# Altium PCB PCB1.PcbDoc
Units mm, origin at the board's own origin, x right, y up, seen from the top; angles counter-clockwise.
Board outline 39 x 14 mm, 2 copper layers (Top Layer, Bottom Layer); 20 components, 24 nets, 112 pads, 25 vias.
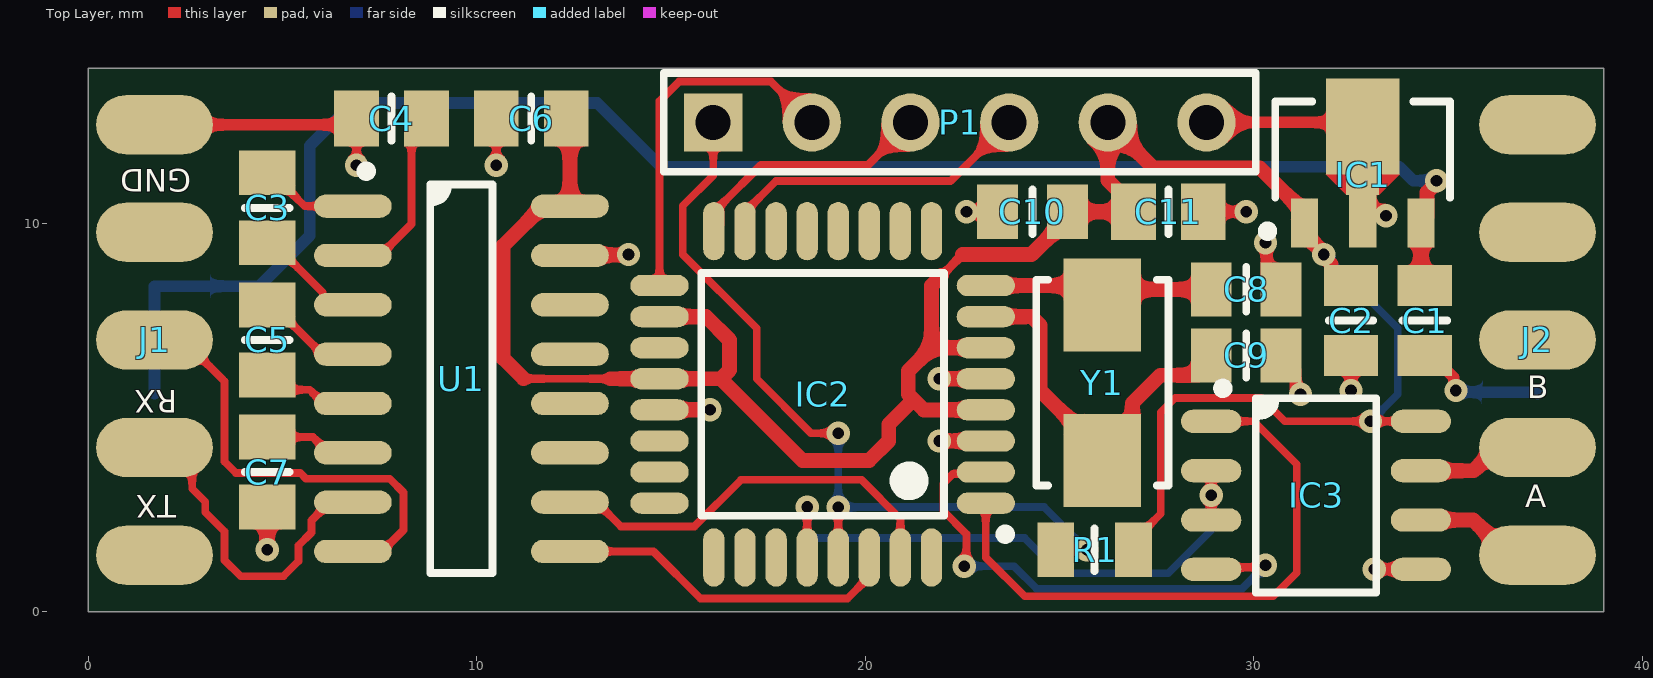
[diagram p0: Top Layer view]
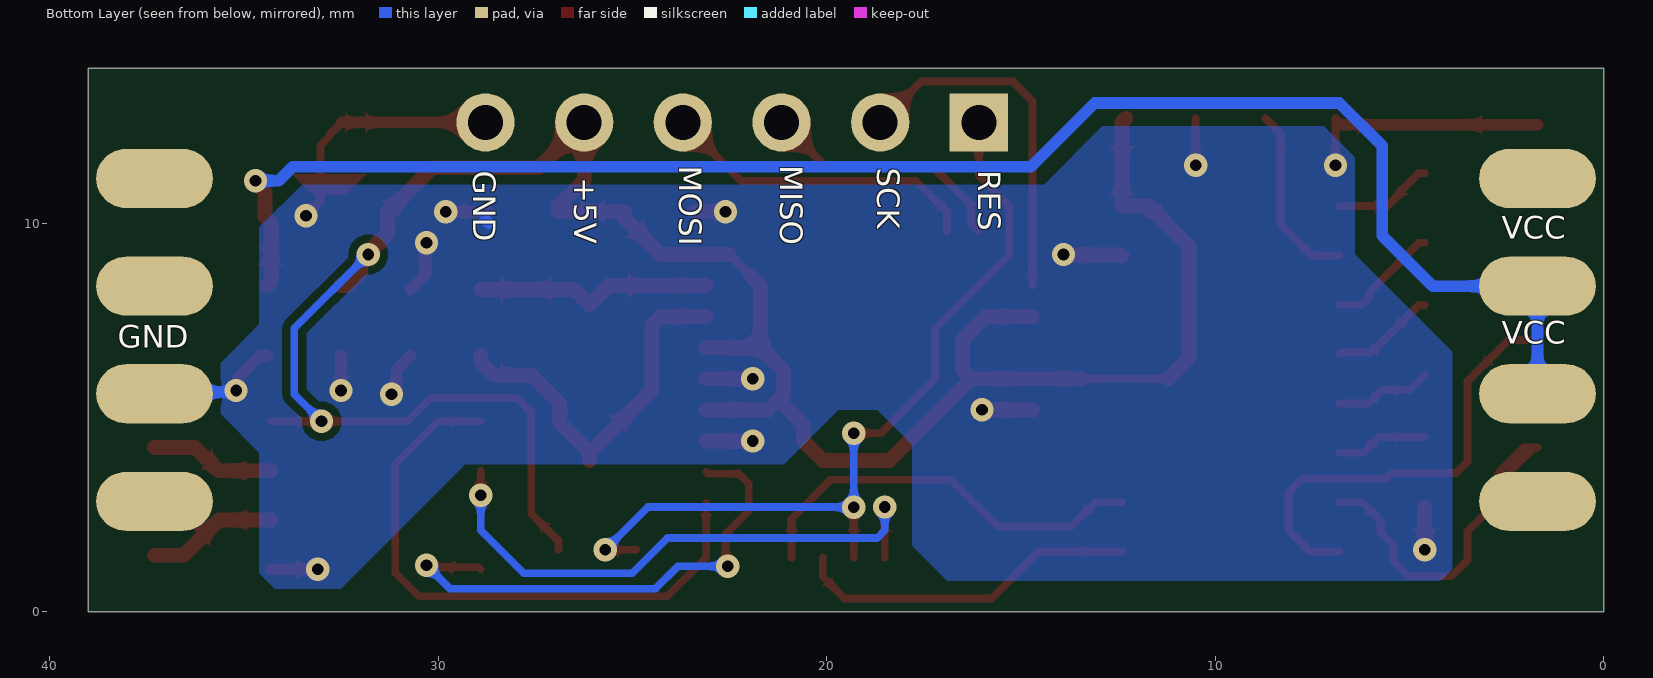
[diagram p1: Bottom Layer view, seen from below]
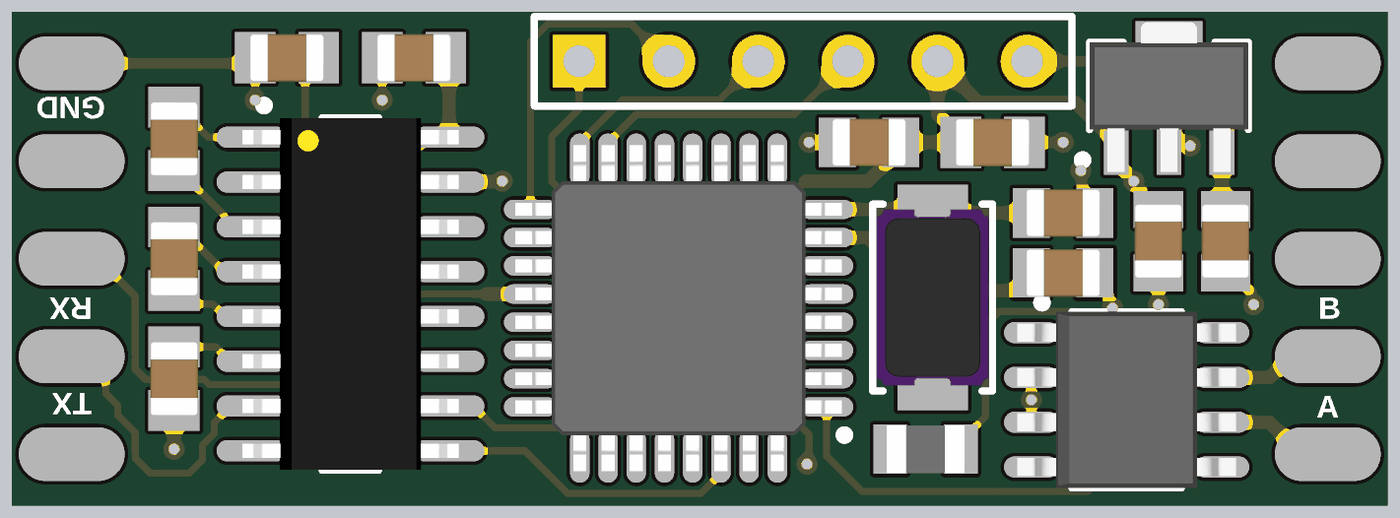
[diagram p2: 3D render of the assembled board from above, using the file's embedded part models]

## Layer stack, top to bottom
Top Solder: solder mask 0.0102, Solder Resist, Dk 3.5
Top Layer: signal copper 0.0356
Dielectric 1: dielectric 0.32, FR-4, Dk 4.8
Bottom Layer: signal copper 0.0356
Bottom Solder: solder mask 0.0102, Solder Resist, Dk 3.5

## Board outline
0,0 0,14 39,14 39,0

## Design rules (kind name [scope] priority, off if disabled: settings)
BoardOutlineClearance [All] p1: gap=0.2 ignorepadtopadclearanceinfootprint=FALSE except(0.4: Arc-SplitBarrior Arc-SplitContinuation Track-SplitBarrior Track-SplitContinuation SMDPad-SplitBarrior SMDPad-SplitContinuation THPad-SplitBarrior THPad-SplitContinuation Via-SplitBarrior Via-SplitContinuation Fill-SplitBarrior Fill-SplitContinuation Poly-SplitBarrior Poly-SplitContinuation Region-SplitBarrior Region-SplitContinuation Text-SplitBarrior Text-SplitContinuation)
Clearance "Clearance Bottom Layer" [OnLayer('Bottom Layer')] p1: gap=0.203 ignorepadtopadclearanceinfootprint=TRUE except(0.254: Arc-Text Track-Text SMDPad-Text THPad-Text Via-Text Fill-Text Poly-Text Region-Text Text-Text)
Clearance "Clearance Top Layer" [OnLayer('Top Layer')] p2: gap=0.203 ignorepadtopadclearanceinfootprint=TRUE except(0.254: Arc-Text Track-Text SMDPad-Text THPad-Text Via-Text Fill-Text Poly-Text Region-Text Text-Text)
Clearance [All] p3: gap=0.2 ignorepadtopadclearanceinfootprint=FALSE except(0.089: Arc-Arc Arc-Track Arc-SMDPad Track-Track Track-SMDPad SMDPad-SMDPad; 0.127: Arc-Via Track-Via SMDPad-Via THPad-Via Via-Via; 0.254: Arc-Text Track-Text SMDPad-Text THPad-Text Via-Text Fill-Text Poly-Text Region-Text Text-Text)
HoleSize [All] p1: absolutevalues=TRUE maxlimit=6.3 minlimit=0.2 maxpercent=80.000 minpercent=20.000
MinimumAnnularRing [All] p1: minimumring=0.076
MinimumSolderMaskSliver [All] p1: minsoldermaskwidth=0.1
PolygonConnect PolygonConnect_1 [All] p1: thpad.connectstyle=Relief thpad.reliefconductorwidth=0.508 thpad.reliefentries=4 thpad.polygonreliefangle="90 Angle" thpad.airgapwidth=0.254 smdpad.connectstyle=Relief smdpad.reliefconductorwidth=0.508 smdpad.reliefentries=4 smdpad.polygonreliefangle="90 Angle" smdpad.airgapwidth=0.254 via.connectstyle=Direct via.reliefconductorwidth=0.508 via.reliefentries=4 via.polygonreliefangle="90 Angle" via.airgapwidth=0.254
RoutingCorners [All] p1: cornerstyle=Round minsetback=2.54 maxsetback=2.54
RoutingVias [All] p1: holewidth=0.5 width=1 viastyle="Through Hole" minholewidth=0.2 minwidth=0.45 maxholewidth=1 maxwidth=2
SilkToSilkClearance [All] p1: silktosilkclearance=0.1
SilkToSolderMaskClearance [IsPad] p1: minsilkscreentomaskgap=0.1 clearancetoexposedcopper=TRUE
SolderMaskExpansion [All] p1: expansion=0.102 istentingtop=FALSE
Width [All] p1: maxlimit=2.54 minlimit=0.089 preferedwidth=0.381
25 further rules are at their usual default settings.

## Components (designator, comment, footprint, x,y, rotation, side; value= is the part's Value field where it differs from the comment)
C1 "100nF" CAPC2012X135N 34.4,7.5 r90 top
C2 "100nF" CAPC2012X135N 32.5,7.5 r90 top
C3 "1uF" CAPC2012X140N 4.6,10.4 r90 top
C4 "1uF" CAPC2012X140N 7.8,12.7 r180 top
C5 "1uF" CAPC2012X140N 4.6,7 r90 top
C6 "1uF" CAPC2012X140N 11.4,12.7 r0 top
C7 "1uF" CAPC2012X140N 4.6,3.6 r90 top
C8 "10pF" CAPC2012X135N 29.8,8.3 r180 top
C9 "10pF" CAPC2012X135N 29.8,6.6 r180 top
C10 "100nF" CAPC2012X135N 24.3,10.3 r0 top
C11 "1uF" CAPC2012X140N 27.8,10.3 r180 top
IC1 "L78L05ACUTR" SOT89 32.8,11.9 r90 top
IC2 "ATMEGA328P-AU" QFP80P900X900X120-32N 18.9,5.6 r180 top
IC3 "SN75176BDR" SOIC127P600X175-8N 31.6,3 r0 top
J1 "D-Sub 9F" D-Sub 1.7,7 r270 top
J2 "D-Sub 9M" D-Sub 37.3,7 r270 top
P1 "Header 6" HDR1X6 16.08,12.6 r0 top
R1 "10k" RESC2012X60N 25.9,1.6 r180 top
U1 "MAX232IDR" "SOIC-16 9.9X3.9MM P1.27MM" 9.6,6 r0 top
Y1 "16 MHz" "NDK NX5032GA" 26.1,5.9 r90 top

## Footprints (in the part's own frame and the unit in brackets; to place one, negate y for a bottom-side part, rotate by r counter-clockwise, add the part's x,y. Pads: shape width x height; smd on the part's side, far side on the other; paste and mask are expansions set on the pad)
CAPC2012X135N [mm] "Chip Capacitor, Body 2.0x1.25mm, IPC Medium Density"
  rect 1.05x1.4 smd: 1(-0.9,0) 2(0.9,0)
  silkscreen extent 0,-0.58 0,0.58, body extent -1.05,-0.67 1.05,0.68, height 1.25
CAPC2012X140N [mm] "Chip Capacitor, Body 2.0x1.25mm, IPC Medium Density"
  rect 1.15x1.45 smd: 1(-0.9,0) 2(0.9,0)
  silkscreen extent 0,-0.58 0,0.58, body extent -1.05,-0.67 1.05,0.68, height 1.3
D-Sub [mm] "D-Sub 9-Pin"
  oval 1.524x3 smd: 1(5.54,0) 2(2.77,0) 3(0,0) 4(-2.77,0) 5(-5.54,0)
  oval 1.524x3 smd far side: 6(4.155,0) 7(1.385,0) 8(-1.385,0) 9(-4.155,0)
HDR1X6 [mm] "Connector; Header; 6 Position"
  rect 1.5x1.5 hole 0.9: 1(0,0)
  round 1.5 hole 0.9: 2(2.54,0) 3(5.08,0) 4(7.62,0) 5(10.16,0) 6(12.7,0)
  silkscreen extent -1.27,-1.27 13.97,1.27
"NDK NX5032GA" [mm] "Crystal, 2-Leads, Body 5.00x3.20mm, IPC Medium Density"
  rect 2.4x2 smd: 1(-2,0) 2(2,0)
  silkscreen extent -2.65,-1.7 2.65,1.7, body extent -2.5,-1.6 2.5,1.6, height 1.2
QFP80P900X900X120-32N [mm] "QFP,0.80mm Pitch, Square; 32 Pin, 7.00mm L X 7.00mm W X 1.20mm H Body, IPC Medium Density"
  oval 1.5x0.55 smd: 1(-4.2,2.8) 2(-4.2,2) 3(-4.2,1.2) 4(-4.2,0.4) 5(-4.2,-0.4) 6(-4.2,-1.2) 7(-4.2,-2) 8(-4.2,-2.8) 17(4.2,-2.8) 18(4.2,-2) 19(4.2,-1.2) 20(4.2,-0.4) 21(4.2,0.4) 22(4.2,1.2) 23(4.2,2) 24(4.2,2.8)
  oval 0.55x1.5 smd: 9(-2.8,-4.2) 10(-2,-4.2) 11(-1.2,-4.2) 12(-0.4,-4.2) 13(0.4,-4.2) 14(1.2,-4.2) 15(2,-4.2) 16(2.8,-4.2) 25(2.8,4.2) 26(2,4.2) 27(1.2,4.2) 28(0.4,4.2) 29(-0.4,4.2) 30(-1.2,4.2) 31(-2,4.2) 32(-2.8,4.2)
  silkscreen extent -4.83,-3.13 3.13,3.72, body extent -4.62,-4.62 4.62,4.62, height 1.2
RESC2012X60N [mm] "Chip Resistor, EIA 0805, Metric 2012, Body 2.0x1.2mm, IPC Medium Density"
  rect 0.95x1.4 smd: 1(-1,0) 2(1,0)
  silkscreen extent 0,-0.55 0,0.55, body extent -1.1,-0.67 1.1,0.68, height 0.6
SOIC127P600X175-8N [mm] "SOIC 8, Pitch 1.27mm - Body 4x5mm, IPC Medium Density"
  oval 1.55x0.6 smd: 1(-2.7,1.905) 2(-2.7,0.635) 3(-2.7,-0.635) 4(-2.7,-1.905) 5(2.7,-1.905) 6(2.7,-0.635) 7(2.7,0.635) 8(2.7,1.905)
  silkscreen extent -2.52,-2.5 1.55,2.88, body extent -3.1,-2.5 3.1,2.5, height 1.75
"SOIC-16 9.9X3.9MM P1.27MM" [mm] "SOIC, 16-Leads, Body 9.9x3.9mm, Pitch 1.27mm, IPC Low Density"
  oval 2x0.6 smd: 1(-2.794,4.445) 2(-2.794,3.175) 3(-2.794,1.905) 4(-2.794,0.635) 5(-2.794,-0.635) 6(-2.794,-1.905) 7(-2.794,-3.175) 8(-2.794,-4.445) 9(2.794,-4.445) 10(2.794,-3.175) 11(2.794,-1.905) 12(2.794,-0.635) 13(2.794,0.635) 14(2.794,1.905) 15(2.794,3.175) 16(2.794,4.445)
  silkscreen extent -2.57,-5 0.8,5.47, body extent -3.07,-4.99 3.07,4.98, height 1.88
SOT89 [mm] "SOT89-3, 3-Leads, Body 2.48x4.5mm"
  rect 1.25x0.7 smd: 1(-1.89,1.5) 3(-1.89,-1.5)
  rect 1.35x0.7 smd: 2(-1.84,0)
  rect 3x0.85 smd: 2(0.33,0)
  rect 2.475x0.525 smd: 2(0.592,-0.687) 2(0.592,0.687)
  Top Layer region: -1.165,0.425 -0.64,0.95 -0.64,-0.95 -1.165,-0.425
  silkscreen extent -2.22,-2.25 1.24,2.57, body extent -2.44,-2.25 1.81,2.25, height 1.6

## Part data
C1 C2 C10: library part CC0805_100NF_50V_10%_X7R, "Non-polarised capacitor", Case=0805, Manufacturer=GENERIC, Manufacturer1 ComponentHeight=1mm, Manufacturer1 Example=TDK, Manufacturer1 Part Number=C2012X7R1H104K085, Tolerance=±10%, Voltage=50V, Author="CERN DEM JLC", Component Type=Standard, CreateDate=03.12.2007, HelpURL=\\cern.ch\dfs\Applications\Altium\Datasheets\CC0805_X7R_TDK_C.pdf, LatestRevisionDate=22.04.2015, Manufacturer Part Number=CC0805_100NF_50V_10%_X7R, Mounted=Yes, Part Description="SMD Multilayer Chip Ceramic Capacitor", Part Number=CC0805_100NF_50V_10%_X7R, Pin Count=2, Sense=No, SMD=Yes, Socket=No, Status=Preferred, TC=X7R
C3 C4 C5 C6 C7 C11: library part CC0805_1UF_25V_10%_X7R, "Non-polarised capacitor", Case=0805, Manufacturer=GENERIC, Manufacturer1 ComponentHeight=1.4mm, Manufacturer1 Example=KEMET, Manufacturer1 Part Number=C0805C105K3RAC, Tolerance=±10%, Voltage=25V, Author="CERN DEM JLC", Component Type=Standard, CreateDate=23.03.2009, HelpURL=\\cern.ch\dfs\Applications\Altium\Datasheets\CC0805_X7R_KEMET.pdf, LatestRevisionDate=23.03.2009, Manufacturer Part Number=CC0805_1UF_25V_10%_X7R, Mounted=Yes, Part Description="SMD Multilayer Chip Ceramic Capacitor", Part Number=CC0805_1UF_25V_10%_X7R, Pin Count=2, Sense=No, SMD=Yes, Socket=No, Status=Preferred, TC=X7R
C8 C9: library part CC0805_10PF_50V_1%_NP0, "Non-polarised capacitor", Case=0805, Manufacturer=GENERIC, Manufacturer1 ComponentHeight=1.35mm, Manufacturer1 Example=PHYCOMP, Manufacturer1 Part Number=223886118109, Tolerance=±1%, Voltage=50V, Author="CERN DEM MR", Component Type=Standard, CreateDate=31.05.2016, HelpURL=\\cern.ch\dfs\Applications\Altium\Datasheets\CC0805_NP0_PHYCOMP.pdf, LatestRevisionDate=31.05.2016, Manufacturer Part Number=CC0805_10PF_50V_1%_NP0, Mounted=Yes, Part Description="SMD Multilayer Chip Ceramic Capacitor", Part Number=CC0805_10PF_50V_1%_NP0, Pin Count=2, Sense=No, SMD=Yes, Socket=No, Status=None, TC=C0G/NP0
IC1: "49dB@(120Hz) 100mA 1.7V@(40mA) Fixed 5V~5V Positive 1 30V SOT-89(SOT-89-3) Linear Voltage Regulators (LDO) ROHS", Case=SOT89, Manufacturer="ST MICROELECTRONICS", Author="CERN DEM JLC", Bonding=No, Component Type=Standard, ComponentHeight=1.6mm, CreateDate=10.10.2011, Device=L78L05ACUTR, HelpURL=\\cern.ch\dfs\Applications\Altium\Datasheets\L78L05ACUTR.pdf, LatestRevisionDate=06.12.2011, Manufacturer Part Number=L78L05ACUTR, Mounted=Yes, PackageDescription="SOT89-3, 3-Leads, Body 2.44x4.5mm", Part Description="5V 100mA Positive Voltage Regulator", Part Number=L78L05ACUTR, Pin Count=4, PressFit=No, Sense=No, SMD=Yes, Socket=No
IC2: "8-bit AVR Microcontroller, 32KB Flash, 1KB EEPROM, 2KB SRAM, 32-Pin TQFP", Case=QFP32, Manufacturer=ATMEL, Author="CERN DEM JLC", Bonding=No, Component Type=Standard, ComponentHeight=1.2mm, CreateDate=02.07.2014, Device=ATMEGA328P-AU, HelpURL=\\cern.ch\dfs\Applications\Altium\Datasheets\ATMEGA328P-AU.pdf, LatestRevisionDate=02.07.2014, Manufacturer Part Number=ATMEGA328P-AU, Mounted=Yes, PackageDescription="QFP, 0.80mm Pitch, Square; 32 Pin, 7.00mm L X 7.00mm W X 1.20mm H body, IPC Medium Density", Part Description="8-bit AVR Microcontroller, 32KB Flash, 1KB EEPROM, 2KB SRAM, 32-Pin TQFP, Industrial Grade (-40°C to 85°C)", Part Number=ATMEGA328P-AU, Pin Count=32, PressFit=No, Sense=No, SMD=Yes, Socket=No
IC3: library part MAX3485CSA+, "transceiver 4.75V~5.25V 1/1 SOIC-8_150mil RS-485/RS-422 ICs ROHS", Author="CERN DEM JLC"
J1: library part "HARTING_09 67 009 4754", "Connector D-sub 9 Female", Manufacturer=HARTING, Manufacturer Part Number="09 67 009 4754", Author="CERN DEM BC", Component Type=Standard, ComponentHeight=11.6mm, CreateDate=02.09.2021, Family="D-Sub 9F", HelpURL="\\cern.ch\dfs\Applications\Altium\Datasheets\HARTING_09 67 009 4754.pdf", LatestRevisionDate=02.09.2021, Mounted=Yes, Part Description="Straight D-SUB 9 Female Contacts", Part Number="HARTING_09 67 009 4754", Pin Count=11, PressFit=No, Sense=No, SMD=No, Socket=No, Status=None
J2: library part "HARTING_09 66 162 6817", "Connector D-sub 9 Male", Manufacturer=HARTING, Manufacturer Part Number="09 66 162 6817", Author="CERN DEM HF", Component Type=Standard, ComponentHeight=9.7mm, CreateDate=15.10.2021, Family="D-Sub 9M", HelpURL="\\cern.ch\dfs\Applications\Altium\Datasheets\HARTING_09 66 162 6817.pdf", LatestRevisionDate=15.10.2021, Mounted=Yes, Part Description="Right Angled D-Sub 9 Male Contacts With Grounding Board Locks And UNC 4-40 Flange Thread", Part Number="HARTING_09 66 162 6817", Pin Count=11, PressFit=No, Sense=No, SMD=No, Socket=No, Status=None
P1: "Header, 6-Pin", LatestRevisionDate=17-Jul-2002, LatestRevisionNote="Re-released for DXP Platform.", Publisher="Altium Limited"
R1: library part R0805_10K_1%_0.125W_100PPM, "Resistor - 1%", Case=0805, Manufacturer=GENERIC, Manufacturer1 ComponentHeight=0.6mm, Manufacturer1 Example="NIC COMPONENT", Manufacturer1 Part Number=NRC10F1002TRF, Power=0.125W, Tolerance=±1%, Author="CERN DEM JLC", Component Type=Standard, CreateDate=03.12.2007, HelpURL=\\cern.ch\dfs\Applications\Altium\Datasheets\R0805_NIC_NRC.pdf, LatestRevisionDate=13.03.2008, Manufacturer Part Number=R0805_10K_1%_0.125W_100PPM, Mounted=Yes, Part Description="General Purpose Thick Film Chip Resistor", Part Number=R0805_10K_1%_0.125W_100PPM, Pin Count=2, PressFit=No, Sense=No, SMD=Yes, Socket=No, Status=Preferred, TC=±100ppm/°C
U1: library part "MAX232 (SMD)", "120Kbps 4.5V~5.5V transceiver 2/2 SOIC-16 RS232 ICs ROHS", PartNumber=MAX232IDR
Y1: library part NX5032GA-16MHZ-STD-CSK-4, "CRYSTAL 16.0000MHZ 8PF SMD", ESR (Equivalent Series Resistance)="50 Ohms", Frequency Stability=±30ppm, Frequency Tolerance=±20ppm, Load Capacitance=8pF, Manufacturer="NDK America, Inc.", Operating Mode=Fundamental, Operating Temperature="-10°C ~ 70°C", Package / Case="2-SMD, No Lead", Supplier Part Number 1=644-1187-1-ND, ComponentLink1Description=Datasheet, ComponentLink1URL=http://www.ndk.com/images/products/catalog/c_NX5032GA_e.pdf, ComponentLink2Description="DigiKey Link", ComponentLink2URL=https://www.digikey.com/en/products/detail/ndk-america-inc/NX5032GA-16MHZ-STD-CSK-4/3125646, Frequency="16 MHz", Height - Seated (Max)="0.059\" (1.50mm)", LastUpdated="07.08.2022 9:32:59", Lifecycle Status=Active, Minimum Order=1, Mounting Type="Surface Mount", Packaging=TapeAndReel, Part Number=NX5032GA-16MHZ-STD-CSK-4, Part Status=Active, PartId=630, Price=0.34, Series=NX5032GA, Size / Dimension="0.197\" L x 0.126\" W (5.00mm x 3.20mm)", Supplier 1=DigiKey, Type="MHz Crystal"

## Via types
v1: diameter 0.6, hole 0.3, Top Layer to Bottom Layer, tented both sides, 25 vias

## Nets (pads, with @x,y where several pads share a name; then routed paths per layer and width w, separated by ;. In a path a pad name is that pad's centre, name@x,y a point inside that pad or via, vN(x,y) a via of type N, cw(c..) or ccw(c..) an arc to the next point about the centre after c; other vN are vias at no path point)
+5: C2.2 C6.2 C10.2 C11.2 IC1.1 IC2.4 IC2.6 IC2.18 IC2.20 IC3.8 P1.5 R1.1 U1.16 | length 63.1
  Top Layer w0.2: 11.2,6 13.44,6 ; 21.956,8.656 22.5,9.2 ; R1.1 26.9,1.825 27.6,2.525 27.6,5.131 27.977,5.508 30.192,5.508 30.795,4.905 v1(33,4.905) IC3.8
  Top Layer w0.381: 11.2,6 10.674,6.526 10.674,9.426 11.694,10.445 U1.16 12.394,12.606 C6.2 ; 13.44,6 IC2.20 16.277,6 ; IC2.18 15.9,7.6 16.5,7 16.5,6.223 16.277,6 ; 21.236,5.464 20.6,4.829 20.6,4.4 20.1,3.9 18.377,3.9 16.277,6 ; 21.956,8.656 21.7,8.4 21.7,6.8 ; 22.5,9.2 24.275,9.2 25.2,10.125 C10.2 C11.2 26.9,10.45 26.24,11.11 P1.5 27.408,11.432 30.153,11.432 31.3,10.285 IC1.1 31.3,9.735 v1@31.818,9.217 ; IC2.4 21.5,5.2 21.1,5.6 21.1,6.2 21.7,6.8 ; IC2.6 21.7,6.8 ; v1(31.8,9.2) 31.8,9.141 31.99,8.95 31.99,8.735 32.325,8.4 C2.2
  Bottom Layer w0.2: v1(31.8,9.2) 33.7,7.3 33.7,5.605 v1(33,4.905)
GND: C1.1 C2.1 C4.2 C6.1 C7.1 C8.1 C9.1 C10.1 C11.1 IC1.2 IC2.3 IC2.5 IC2.21 IC3.5 J1.5 J2.7 P1.6 U1.15 | length 30.6
  Top Layer w0.2: C4.2@6.74,12.54 C4.2 v1(6.9,11.5) ; v1(10.5,11.5) C6.1 ; IC1.2@32.475,12.6 32.8,12.275 32.8,12.23 33.03,12 33.03,10.57 v1(33.4,10.2)
  Top Layer w0.3: J1.5 C4.2@6.74,12.54 ; C11.1 v1(29.8,10.3) ; P1.6 IC1.2@32.475,12.6 ; v1(30.3,9.5) 30.325,9.475 30.325,8.675 C8.1 ; C9.1 31.075,6.225 31.075,5.806 31.2,5.681 v1(31.2,5.6) ; v1(32.5,5.7) C2.1 ; v1(33.1,1.1) 33.102,1.098 34.297,1.098 IC3.5 ; C1.1 34.575,6.6 35.143,6.032 35.143,5.757 v1(35.2,5.7)
  Top Layer w0.381: v1(4.6,1.6) C7.1 ; U1.15 12.406,9.188 13.888,9.188 v1(13.9,9.2) ; IC2.21 v1(16,5.2) ; v1(21.9,4.4) IC2.3 ; v1(21.9,6) IC2.5 ; v1(22.6,10.3) C10.1
  Bottom Layer w0.3: 28.7,10 28.78,10.08 ; v1(35.2,5.7) 35.242,5.657 37.257,5.657 J2.7
MISO: IC2.16 P1.3 | length 6.5
  Top Layer w0.2: IC2.16 16.275,9.975 16.275,10.468 17.312,11.505 20.065,11.505 P1.3
MOSI: IC2.15 P1.4 | length 8.2
  Top Layer w0.2: IC2.15 16.9,10.293 17.696,11.089 22.189,11.089 P1.4
NetC3_1: C3.1 U1.3 | length 2.9
  Top Layer w0.2: C3.1 4.75,9.5 6.029,8.221 6.029,8.09 6.214,7.905 U1.3
NetC3_2: C3.2 U1.1 | length 2.6
  Top Layer w0.2: C3.2 4.75,11.3 5.225,10.825 5.225,10.786 5.566,10.445 U1.1
NetC4_1: C4.1 U1.2 | length 4.7
  Top Layer w0.2: U1.2 7.506,9.175 8.316,9.985 8.316,12.315 C4.1
NetC5_1: C5.1 U1.5 | length 2.5
  Top Layer w0.2: C5.1 4.984,5.716 5.696,5.716 6.047,5.365 U1.5
NetC5_2: C5.2 U1.4 | length 2.7
  Top Layer w0.2: C5.2 4.75,7.9 5.973,6.677 6.764,6.677 U1.4
NetC7_2: C7.2 U1.6 | length 2.4
  Top Layer w0.2: C7.2 5.782,4.5 6.064,4.218 6.064,4.196 6.165,4.095 U1.6
NetC8_2: C8.2 IC2.8 Y1.2 | length 6.2
  Top Layer w0.381: IC2.8 25.6,8.4 Y1.2 26.5,8.3 C8.2
NetC9_2: C9.2 IC2.7 Y1.1 | length 9.9
  Top Layer w0.381: IC2.7 24.277,7.6 24.5,7.377 24.5,5.7 Y1.1@26.1,4.1 ; Y1.1 Y1.1@26.1,4.1 ; C9.2 28.9,6.425 28.565,6.09 27.59,6.09 26.873,5.373 26.873,4.873 Y1.1@26.1,4.1
R2IN: J1.3 U1.8 | length 11.7
  Top Layer w0.2: J1.3 2.438,7 3.441,5.997 3.5,5.938 3.5,4.312 cw(c2.438,4.23) 3.5,4.148 3.5,3.871 3.559,3.813 3.793,3.578 5.451,3.578 5.601,3.428 7.756,3.428 8.109,3.075 8.109,2.109 7.555,1.555 U1.8
RESET: IC2.29 P1.1 R1.2 | length 21.2
  Top Layer w0.2: P1.1 16.08,11.234 15.3,10.454 15.3,9.2 17.2,7.3 17.2,6 18.6,4.6 v1(19.3,4.6) ; IC2.29 v1(19.3,2.697) ; R1.2 v1(25.7,1.6)
  Bottom Layer w0.2: v1(19.3,4.6) v1(19.3,2.697) 24.603,2.697 v1(25.7,1.6)
RS232_RX: IC2.30 U1.9 | length 8.9
  Top Layer w0.2: U1.9 14.545,1.555 15.757,0.343 19.535,0.343 20.1,0.907 IC2.30
RS232_TX: IC2.31 U1.10 | length 10.7
  Top Layer w0.2: U1.10 13.075,2.825 13.7,2.2 15.6,2.2 16.8,3.4 19.9,3.4 20.9,2.4 IC2.31
RS485_A: IC3.6 J2.1 | length 3.4
  Top Layer w0.381: IC3.6 35.646,2.365 36.551,1.46 J2.1
RS485_B: IC3.7 J2.2 | length 3.2
  Top Layer w0.381: IC3.7 35.658,3.635 36.253,4.23 J2.2
RS485_DE: IC2.28 IC3.2 IC3.3 | length 15.4
  Top Layer w0.2: IC2.28 v1(18.5,2.7) ; IC3.3 v1(28.9,3) IC3.2
  Bottom Layer w0.2: v1(18.5,2.7) 18.5,2.1 18.7,1.9 24.1,1.9 25.003,0.997 27.797,0.997 28.9,2.1 v1(28.9,3)
RS485_RX: IC2.1 IC3.1 | length 15.5
  Top Layer w0.2: IC2.1 23.1,1.4 24.1,0.4 30.494,0.4 31.103,1.009 31.103,3.797 29.995,4.905 IC3.1
RS485_TX: IC2.2 IC3.4 | length 13.3
  Top Layer w0.2: v1(22.54,1.176) 22.6,1.236 22.6,2.005 22.001,2.604 22.001,3.301 22.256,3.556 23.056,3.556 IC2.2 ; IC3.4 28.952,1.148 30.248,1.148 v1(30.3,1.2)
  Bottom Layer w0.2: v1(22.54,1.176) 23.824,1.176 24.406,0.594 29.694,0.594 v1(30.3,1.2)
SCK: IC2.17 P1.2 | length 9.3
  Top Layer w0.2: IC2.17 14.7,10.283 14.7,13.149 15.204,13.653 17.567,13.653 P1.2
T2OUT: J1.2 U1.7 | length 9.4
  Top Layer w0.2: J1.2 J1.2@1.792,4.23 ; J1.2@2.403,3.618 J1.2@1.792,4.23 ; U1.7 6.214,2.825 5.74,2.351 5.74,2.042 5.404,1.706 5.404,1.304 5.017,0.917 3.917,0.917 3.502,1.332 3.502,1.415 3.502,1.418 ccw(c2.438,1.46) 3.5,1.542 3.5,2.071 3.441,2.13 3.005,2.566 3.005,2.833 2.67,3.168 2.67,3.618 2.058,4.23 J1.2@1.792,4.23
VCC: C1.2 IC1.3 J1.7 J1.8 | length 42.8
  Top Layer w0.381: C1.2 34.3,8.5 IC1.3 34.46,10.17 34.46,10.8 34.7,11.041 v1(34.7,11.1)
  Bottom Layer w0.3: J1.7 J1.8 4.4,8.385 5.7,9.685 5.7,12 6.8,13.1 13.099,13.1 14.737,11.462 33.738,11.462 34.1,11.1 v1(34.7,11.1)
pads on no net: IC2.9 IC2.10 IC2.11 IC2.12 IC2.13 IC2.14 IC2.19 IC2.22 IC2.23 IC2.24 IC2.25 IC2.26 IC2.27 IC2.32 J1.1 J1.4 J1.6 J1.9 J2.3 J2.4 J2.5 J2.6 J2.8 J2.9 U1.11 U1.12 U1.13 U1.14

## Polygon pours and split planes (outlines as drawn)
GND on Bottom Layer "GND_L02_P001" (solid, pour order 1): 4.2,0.8 3.9,1.1 3.9,6.7 6.4,9.2 6.4,11.7 7.2,12.5 12.9,12.5 14.4,11 33.5,11 34.6,9.9 34.6,7.4 35.6,6.4 35.6,5.1 34.6,4.1 34.6,1 34.2,0.6 32.5,0.6 29.3,3.8 21.1,3.8 19.7,5.2 18.7,5.2 17.8,4.3 17.8,1.7 16.9,0.8

## Silkscreen, mask and mechanical layers (free items; w line width, h text height)
Top Overlay:
  region: 30.15,5.45 30.15,4.95 ccw(c30.15,5.45) 30.65,5.45
  region: 8.846,10.954 8.846,10.454 ccw(c8.846,10.954) 9.346,10.954
  region: 9.3,11 8.8,11
  text "GND" at 2.65,11.588 h1 r180
  text "RX" at 2.287,5.9 h1 r180
  text "B" at 37.032,5.3 h1
  text "TX" at 2.26,3.2 h1 r180
  text "A" at 36.979,2.5 h1
Bottom Overlay:
  text "MISO" at 21.388,11.493 h1 r90
  text "MOSI" at 23.988,11.482 h1 r90
  text "SCK" at 18.888,11.427 h1 r90
  text "RES" at 16.288,11.364 h1 r90
  text "GND" at 29.288,11.35 h1 r90
  text "+5V" at 26.688,11.19 h1 r90
  text "VCC" at 2.62,9.411 h1
  text "VCC" at 2.62,6.711 h1
  text "GND" at 38.25,6.612 h1
Mechanical 7:
  the board outline again, w0.1